# Altium PCB MSW V4_LienDong.PcbDoc
Units mm, origin at the board's own origin, x right, y up, seen from the top; angles counter-clockwise.
Board outline 48.65 x 10.01 mm, 2 copper layers (Top Layer, Bottom Layer); 20 components, 20 nets, 72 pads, 5 vias.
Unrouted connection lines stored in the file: 2.
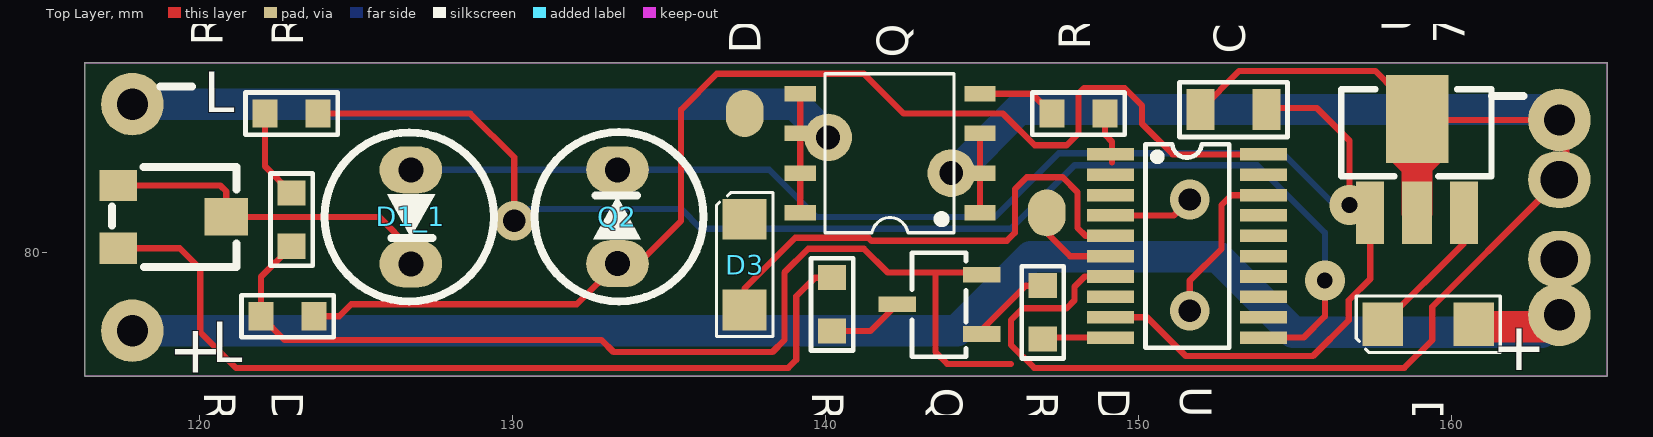
[diagram p0: Top Layer view]
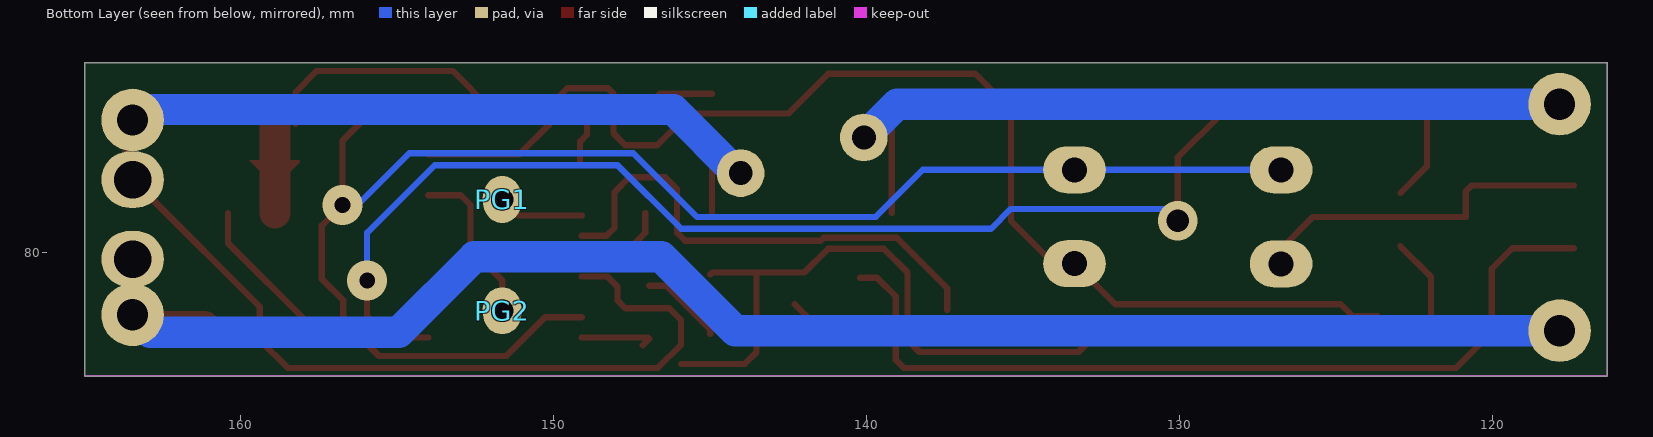
[diagram p1: Bottom Layer view, seen from below]

## Layer stack, top to bottom
Top Solder: solder mask 0.0102, Solder Resist, Dk 3.5
Top Layer: signal copper 0.0356
Dielectric 1: dielectric 0.32, FR-4, Dk 4.8
Bottom Layer: signal copper 0.0356
Bottom Solder: solder mask 0.0102, Solder Resist, Dk 3.5

## Board outline
116.327,76.073 116.327,86.073 cw(c116.332,86.073) 116.332,86.078 164.971,86.078 cw(c164.973,86.073) 164.978,86.073 164.978,76.073 cw(c164.973,76.073) 164.973,76.068 116.334,76.068 cw(c116.332,76.073)

## Design rules (kind name [scope] priority, off if disabled: settings)
Clearance [All] p1: gap=0.15 ignorepadtopadclearanceinfootprint=FALSE except(0: Arc-Hole Track-Hole SMDPad-Hole THPad-Hole Via-Hole Fill-Hole Poly-Hole Region-Hole Text-Hole)
PolygonConnect [All] p1: connectstyle=Relief reliefconductorwidth=0.254 reliefentries=4 polygonreliefangle="90 Angle" airgapwidth=0.254
RoutingVias [All] p1: holewidth=0.711 width=1.27 viastyle="Through Hole" minholewidth=0.711 minwidth=1.27 maxholewidth=0.711 maxwidth=1.27
SolderMaskExpansion [All] p1: expansion=0.102
Width [All] p1: maxlimit=1.5 minlimit=0.2 preferedwidth=0.35 minimp=50.000000 maximp=50.000000 favimp=50.000000
30 further rules are at their usual default settings.

## Classes and differential pairs
component class PMSW: R3 U1

## Components (designator, comment, footprint, x,y, rotation, side; value= is the part's Value field where it differs from the comment)
C1 "106" CR0805 153.035,84.582 r0 top
D1 "1N4001" DO219AB 159.258,77.724 r180 top
D1_1 "No Solder" LED#1 126.746,81.153 r270 top (schematic designator D1)
D3 "4148" DO219AB 137.414,79.629 r90 top
D4 "LED 0603" CR0603#1 122.936,81.065 r270 top
Din "Comment" SMD-Port#1 147.066,81.28 r90 top
Dout "Comment" SMD-Port#1 137.414,84.455 r90 top
PG1 "NRST" SMD-Port#2 151.638,81.709 r90 bottom
PG2 "SWIM" SMD-Port#3 151.638,78.153 r90 bottom
Q1 "C1815" SOT23 143.637,78.359 r180 top
Q2 "" LED#2 133.35,81.157 r90 top
Q3 "AO4402G" SOIC8 144.932,81.28 r180 top
R1 "1K" CR0603#2 146.939,78.105 r270 top
R2 "100" CR0603#2 140.208,78.359 r90 top
R3 "VR1K" VRSMD 119.126,81.153 r270 top (schematic designator R1)
R4 "10K" CR0603#2 122.809,77.978 r0 top
R5 "1K" CR0603#2 148.082,84.455 r180 top
R6 "470R" CR0603#2 122.936,84.455 r0 top
U1 "7805-SOT89" SOT89 158.901,81.28 r90 top (schematic designator U2)
U2 "STM8S003" TSSOP20 149.098,83.148 r0 top

## Footprints (in the part's own frame and the unit in brackets; to place one, negate y for a bottom-side part, rotate by r counter-clockwise, add the part's x,y. Pads: shape width x height; smd on the part's side, far side on the other; paste and mask are expansions set on the pad)
CR0603#1 [mm]
  rect 0.8x0.9 smd: A(-0.85,0) K(0.85,0)
  silkscreen extent -1.48,-0.67 1.48,0.67
CR0603#2 [mm]
  rect 0.8x0.9 smd: 1(-0.85,0) 2(0.85,0)
  silkscreen extent -1.48,-0.67 1.48,0.67
CR0805 [mm]
  rect 0.9x1.3 smd: 1(-1.05,0) 2(1.05,0)
  silkscreen extent -1.73,-0.87 1.73,0.87
DO219AB [mm]
  rect 1.3x1.4 smd: A(-1.45,0) K(1.45,0)
  silkscreen extent -2.3,-0.9 2.3,0.9
LED#1 [mm]
  oval 1.5x2 hole 0.8: A(-1.5,0) K(1.5,0)
  silkscreen extent -2.7,-2.75 2.7,2.65
LED#2 [mm]
  oval 1.5x2 hole 0.8: C(1.5,0) E(-1.5,0)
  silkscreen extent -2.7,-2.75 2.7,2.65
SMD-Port#1 [mm]
  oval 1.5x1.2 smd: 1(0,0)
SMD-Port#2 [mm]
  oval 1.5x1.2 smd: PG1(0,0)
SMD-Port#3 [mm]
  oval 1.5x1.2 smd: PG2(0,0)
SOIC8 [mm]
  rect 1x0.5 smd: 1(0,0) 2(0,-1.27) 3(0,-2.54) 4(0,-3.81) 5(5.74,-3.81) 6(5.74,-2.54) 7(5.74,-1.27) 8(5.74,0)
  silkscreen extent 0.82,-4.44 4.95,0.64
SOT23 [mm]
  rect 1.2x0.5 smd: 1(-1.35,0.95) 2(1.35,0) 3(-1.35,-0.95)
  silkscreen extent -0.85,-1.65 0.87,1.68
SOT89 [mm]
  rect 2x0.9 smd mask+0.102: 1(0,-1.5)
  rect 2x0.96 smd: 2(0,0)
  rect 2.8x2 smd: 2(3,0)
  rect 2x0.9 smd: 3(0,1.5)
  Top Layer region: 0.925,0.475 1.3,0.475 1.625,0.8 1.675,0.8 1.675,-0.825 1.325,-0.475 0.925,-0.475
  silkscreen extent 1.18,-2.38 3.95,2.42
TSSOP20 [mm]
  rect 1.5x0.4 smd: 1(0,0) 2(0,-0.65) 3(0,-1.3) 4(0,-1.95) 5(0,-2.6) 6(0,-3.25) 7(0,-3.9) 8(0,-4.55) 9(0,-5.2) 10(0,-5.85) 11(4.9,-5.85) 12(4.9,-5.2) 13(4.9,-4.55) 14(4.9,-3.9) 15(4.9,-3.25) 16(4.9,-2.6) 17(4.9,-1.95) 18(4.9,-1.3) 19(4.9,-0.65) 20(4.9,0)
  silkscreen extent 1.12,-6.18 3.8,0.33
VRSMD [mm]
  rect 1x1.2 smd: 1(-1,-1.725) 2(1,-1.725)
  rect 1.2x1.4 smd: 3(0,1.725)
  silkscreen extent -1.6,-1.93 1.6,2.05

## Part data
D1_1: library part LED
Q2: library part Phototran
R3: library part VRES
U1: library part 7805

## Free pads (board coordinates)
  round 2 hole 1: 0(117.851,77.518) 0(163.449,78.026) 1(117.851,84.757) 1(163.449,84.249)
  round 1.524 hole 0.762: 0(144.018,82.55) 1(140.081,83.693)
  oval 2x1.8 hole 1.2: 0(163.449,79.804) 0(163.449,82.344)

## Via types
v1: diameter 1.27, hole 0.711, Top Layer to Bottom Layer, 3 vias
v2: diameter 1.27, hole 0.5, Top Layer to Bottom Layer, 2 vias

## Nets (pads, with @x,y where several pads share a name; then routed paths per layer and width w, separated by ;. In a path a pad name is that pad's centre, name@x,y a point inside that pad or via, vN(x,y) a via of type N, cw(c..) or ccw(c..) an arc to the next point about the centre after c; other vN are vias at no path point)
Net5VCC: C1.2 D1_1.A Q2.C U1.3 U2.9 | length 49.6
  Top Layer w0.2: U2.9 150.271,77.948 151.511,76.708 155.575,76.708 156.718,77.851 156.718,78.486 157.401,79.169 157.401,80.875 v2(156.742,81.534) 156.742,83.59 155.702,84.63 C1.2@154.212,84.63
  Bottom Layer w0.2: D1_1.A 126.75,82.657 Q2.C 138.196,82.657 139.7,81.153 145.415,81.153 147.447,83.185 154.607,83.185 v2@156.337,81.455
Net+12V: D1.A pad.0@117.851,77.518 pad.0@163.449,78.026 pad.0@163.449,79.804 | length 52
  Top Layer w0.2: pad.0@163.449,78.026 pad.0@163.449,79.804
  Top Layer w1: D1.A@161.163,77.645 163.068,77.645 pad.0@163.449,78.026
  Bottom Layer w1: pad.0@117.851,77.518 144.193,77.518 146.558,79.883 152.527,79.883 154.94,77.47 162.893,77.47 pad.0@163.449,78.026
Net-Din: Din.1 U2.6 | length 3
  Top Layer w0.2: Din.1 147.066,80.645 147.813,79.898 U2.6
Net-Dout: D3.A U2.5 | length 16.2
  Top Layer w0.2: D3.A 137.414,78.867 139.034,80.487 141.369,80.487 141.465,80.391 145.796,80.391 146.05,80.645 146.05,82.042 146.431,82.423 147.574,82.423 148.049,81.948 148.049,80.805 148.306,80.548 U2.5
Net-Dout1: D3.K Dout.1
NetD1K: D1.K U1.1 | length 4.6
  Top Layer w0.2: D1.K 160.401,80.317 U1.1
NetD2K: D1_1.K R3.1 R3.3 | length 11.5
  Top Layer w0.2: R3.1 120.666,82.153 120.851,81.968 R3.3 125.73,81.153 126.746,80.137 D1_1.K ; D1_1.K@126.869,79.657 D1_1.K@126.869,80.014
NetD4A: D4.A R6.1 | length 2.9
  Top Layer w0.2: R6.1 122.086,82.765 D4.A
NetGND: C1.1 D4.K pad.0@144.018,82.55 pad.0@163.449,82.344 pad.1@163.449,84.249 Q1.3 Q3.1 Q3.2 Q3.3 R4.1 U1.2 U2.7 | length 101.1
  Top Layer w0.2: D4.K 121.959,79.238 R4.1 122.721,77.216 132.842,77.216 133.223,76.835 138.303,76.835 138.684,77.216 138.684,79.375 139.446,80.137 141.224,80.137 141.986,79.375 143.51,79.375 ; Q3.1 Q3.2 Q3.3 ; Q1.3 144.921,79.375 143.51,79.375 ; 145.923,76.454 143.891,76.454 143.51,76.835 143.51,79.375 ; U2.7 148.28,79.248 147.955,78.923 147.955,78.486 147.701,78.232 146.304,78.232 145.923,77.851 145.923,77.067 146.662,76.328 158.497,76.328 159.385,77.216 159.385,78.28 162.893,81.788 162.893,83.01 163.467,83.01 163.672,83.215 163.672,83.505 163.449,83.728 163.449,84.249 158.932,84.249 U1.2@158.901,84.28 ; C1.1@151.985,84.743 C1.1 153.221,85.818 157.562,85.818 158.242,85.138 U1.2@158.242,84.122
  Top Layer w1: U1.2@158.901,81.28 U1.2@158.901,84.28
  Bottom Layer w1: pad.0@144.018,82.55 144.145,82.55 146.177,84.582 163.116,84.582 pad.1@163.449,84.249
NetNRST: PG1.PG1 U2.4 | length 2.8
  Top Layer w0.2: U2.4 151.127,81.198 v1(151.638,81.709)
NetOUT-: pad.1@117.851,84.757 pad.1@140.081,83.693 Q3.5 Q3.6 Q3.7 Q3.8 | length 26.5
  Top Layer w0.2: Q3.8 Q3.7 Q3.6 Q3.5
  Bottom Layer w1: pad.1@117.851,84.757 139.017,84.757 pad.1@140.081,83.693
NetQ1-1: Q1.1 R1.1 | length 2.7
  Top Layer w0.2: Q1.1 144.987,77.55 146.392,78.955 R1.1
NetQ1-2: Q1.2 R2.1 | length 2.4
  Top Layer w0.2: R2.1 141.437,77.509 Q1.2
NetR1-2: R2.2 R3.2 | length 28
  Top Layer w0.2: R3.2 119.364,80.153 120.015,79.502 120.015,77.47 121.157,76.328 138.812,76.328 139.065,76.581 139.065,78.613 139.661,79.209 R2.2
NetR5-2: Q3.4 R5.2 | length 2.6
  Top Layer w0.2: Q3.4 146.597,85.09 R5.2
NetSWIM: PG2.PG2 U2.18 | length 5.3
  Top Layer w0.2: v1(151.638,78.153) 151.638,79.121 152.654,80.137 152.654,81.534 152.968,81.848 U2.18
NetU2-1: R5.1 U2.1 | length 1.7
  Top Layer w0.2: R5.1@148.932,84.503 148.932,83.78 149.151,83.561 149.151,82.897
NetU2-10: R1.2 U2.10 | length 2.5
  Top Layer w0.2: R1.2@147.147,77.047 R1.2 146.982,77.298 U2.10
NetU2-11: R6.2 U2.11 | length 41.8
  Top Layer w0.2: R6.2 128.651,84.455 130.048,83.058 v1(130.048,81.026) ; U2.11 155.276,77.298 155.956,77.978 v2(155.956,79.121)
  Bottom Layer w0.2: v1(130.048,81.026) 130.429,81.407 135.382,81.407 136.017,80.772 145.923,80.772 147.955,82.804 153.797,82.804 155.956,80.645 v2(155.956,79.121)
NetU2-20: Q2.E R4.2 U2.20 | length 39.3
  Top Layer w0.2: R4.2 124.46,77.978 124.841,78.359 132.052,78.359 Q2.E 134.013,79.657 135.382,81.026 135.382,84.582 136.525,85.725 141.224,85.725 142.494,84.455 145.669,84.455 146.685,83.439 147.701,83.439 148.082,83.82 148.082,85.09 148.257,85.265 149.558,85.265 150.114,84.709 150.114,84.122 151.088,83.148 U2.20
pads on no net: U2.2 U2.3 U2.8 U2.12 U2.13 U2.14 U2.15 U2.16 U2.17 U2.19
copper on no net: | length 0.5
  Top Layer w0.2: 162.941,83.741 163.322,83.36

## Keep-outs
Keep-Out Layer:
  lines w0.01: 116.332,76.073 116.332,86.073 ; 116.332,76.073 164.973,76.073 ; 116.332,76.073 116.332,86.073 ; 116.332,86.073 164.973,86.073 ; 164.973,76.073 164.973,86.073 ; 164.973,76.073 164.973,86.073

## Silkscreen, mask and mechanical layers (free items; w line width, h text height)
Top Overlay:
  lines w0.254: 118.74,85.313 119.756,85.313 ; 161.29,85.011 162.306,85.011
  text "L" at 120.137,84.503 h1.3
  text "L" at 120.391,76.502 h1.3
  text "+" at 161.29,76.248 h1.52
  text "+" at 118.994,76.169 h1.52